# EAGLE board Temp controlled fan v0.1 (EAGLE 8.4.1)
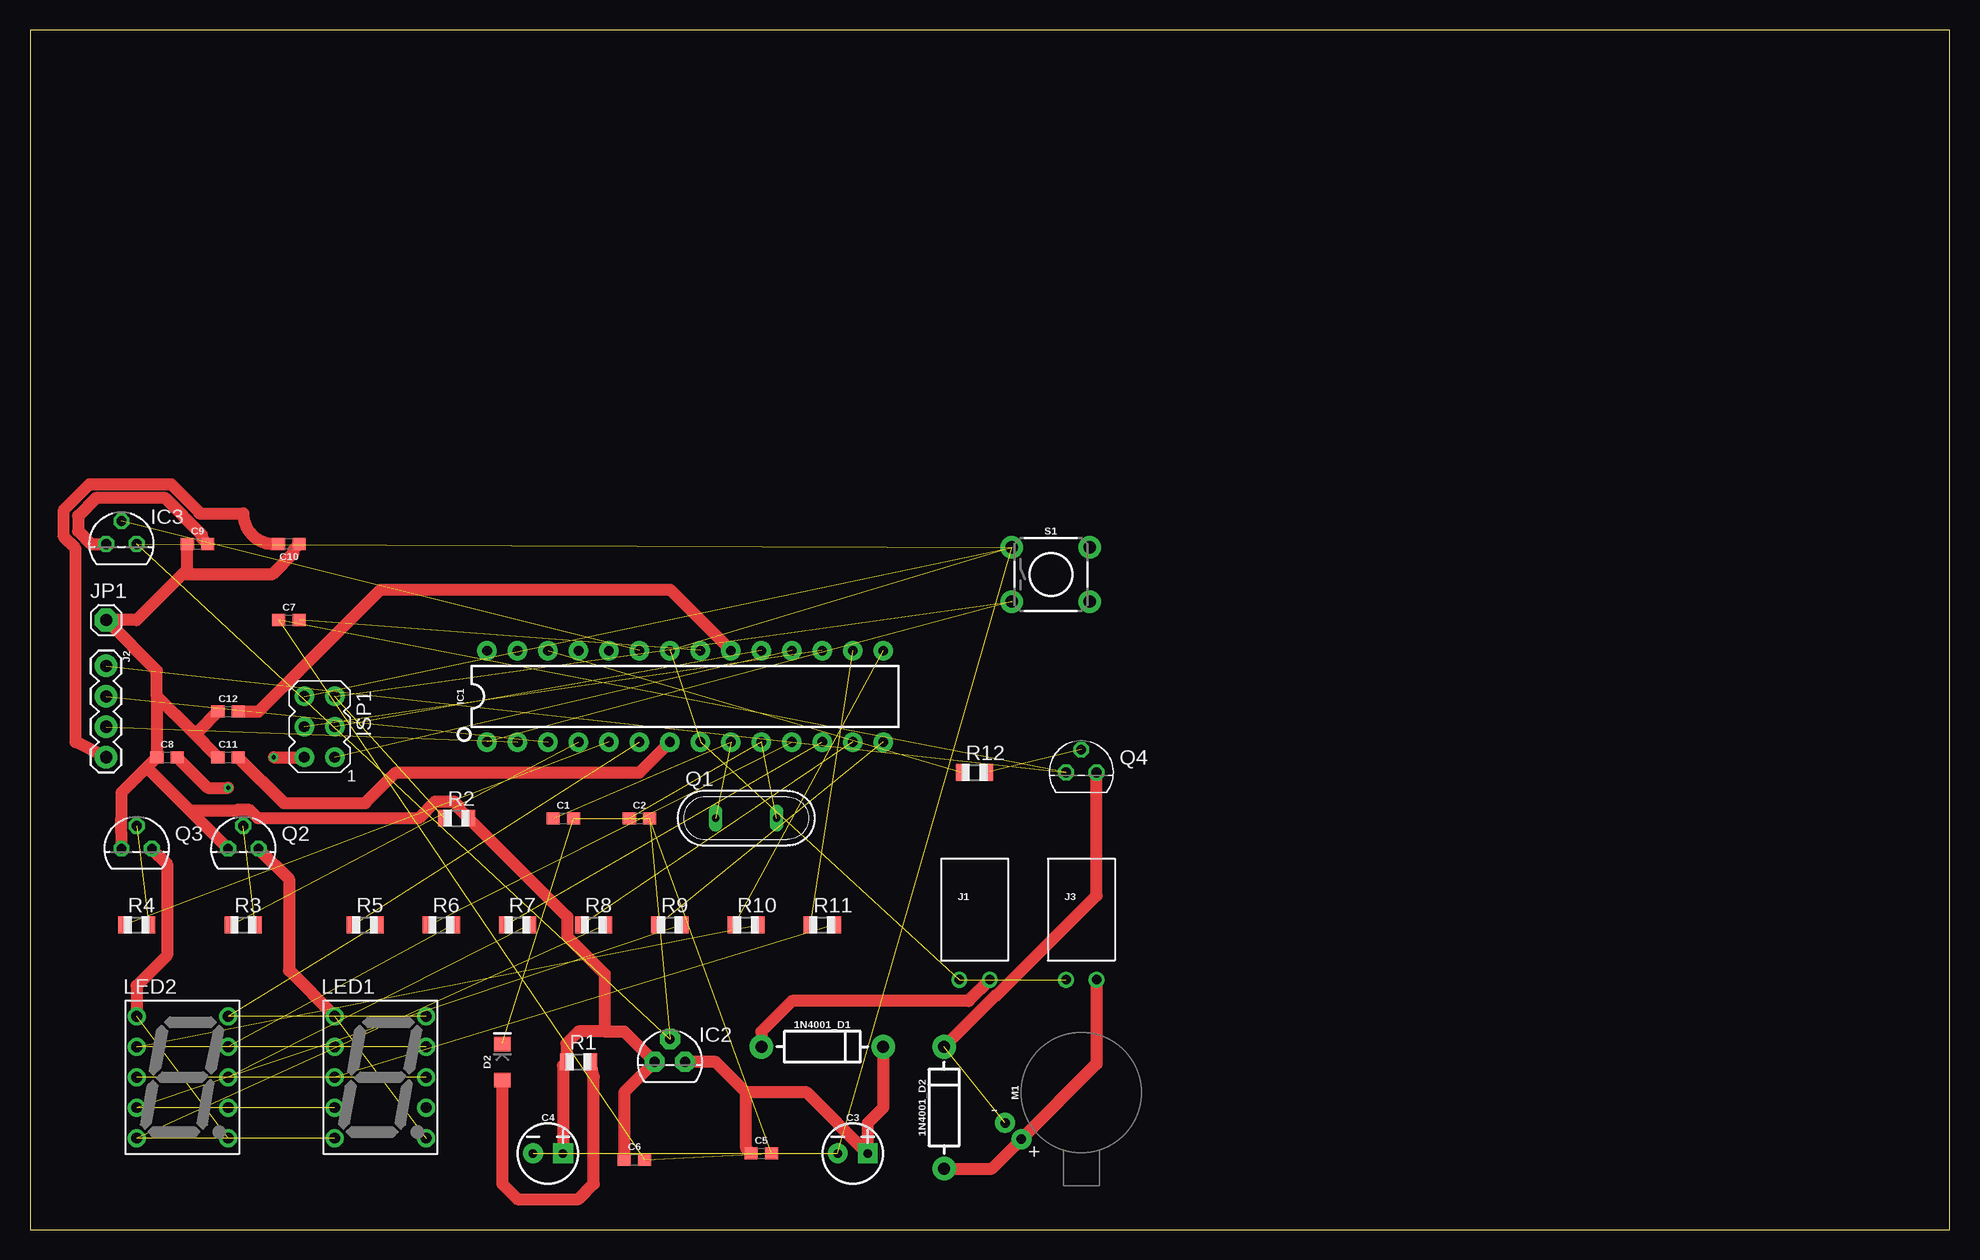
[diagram p0: board, top side]
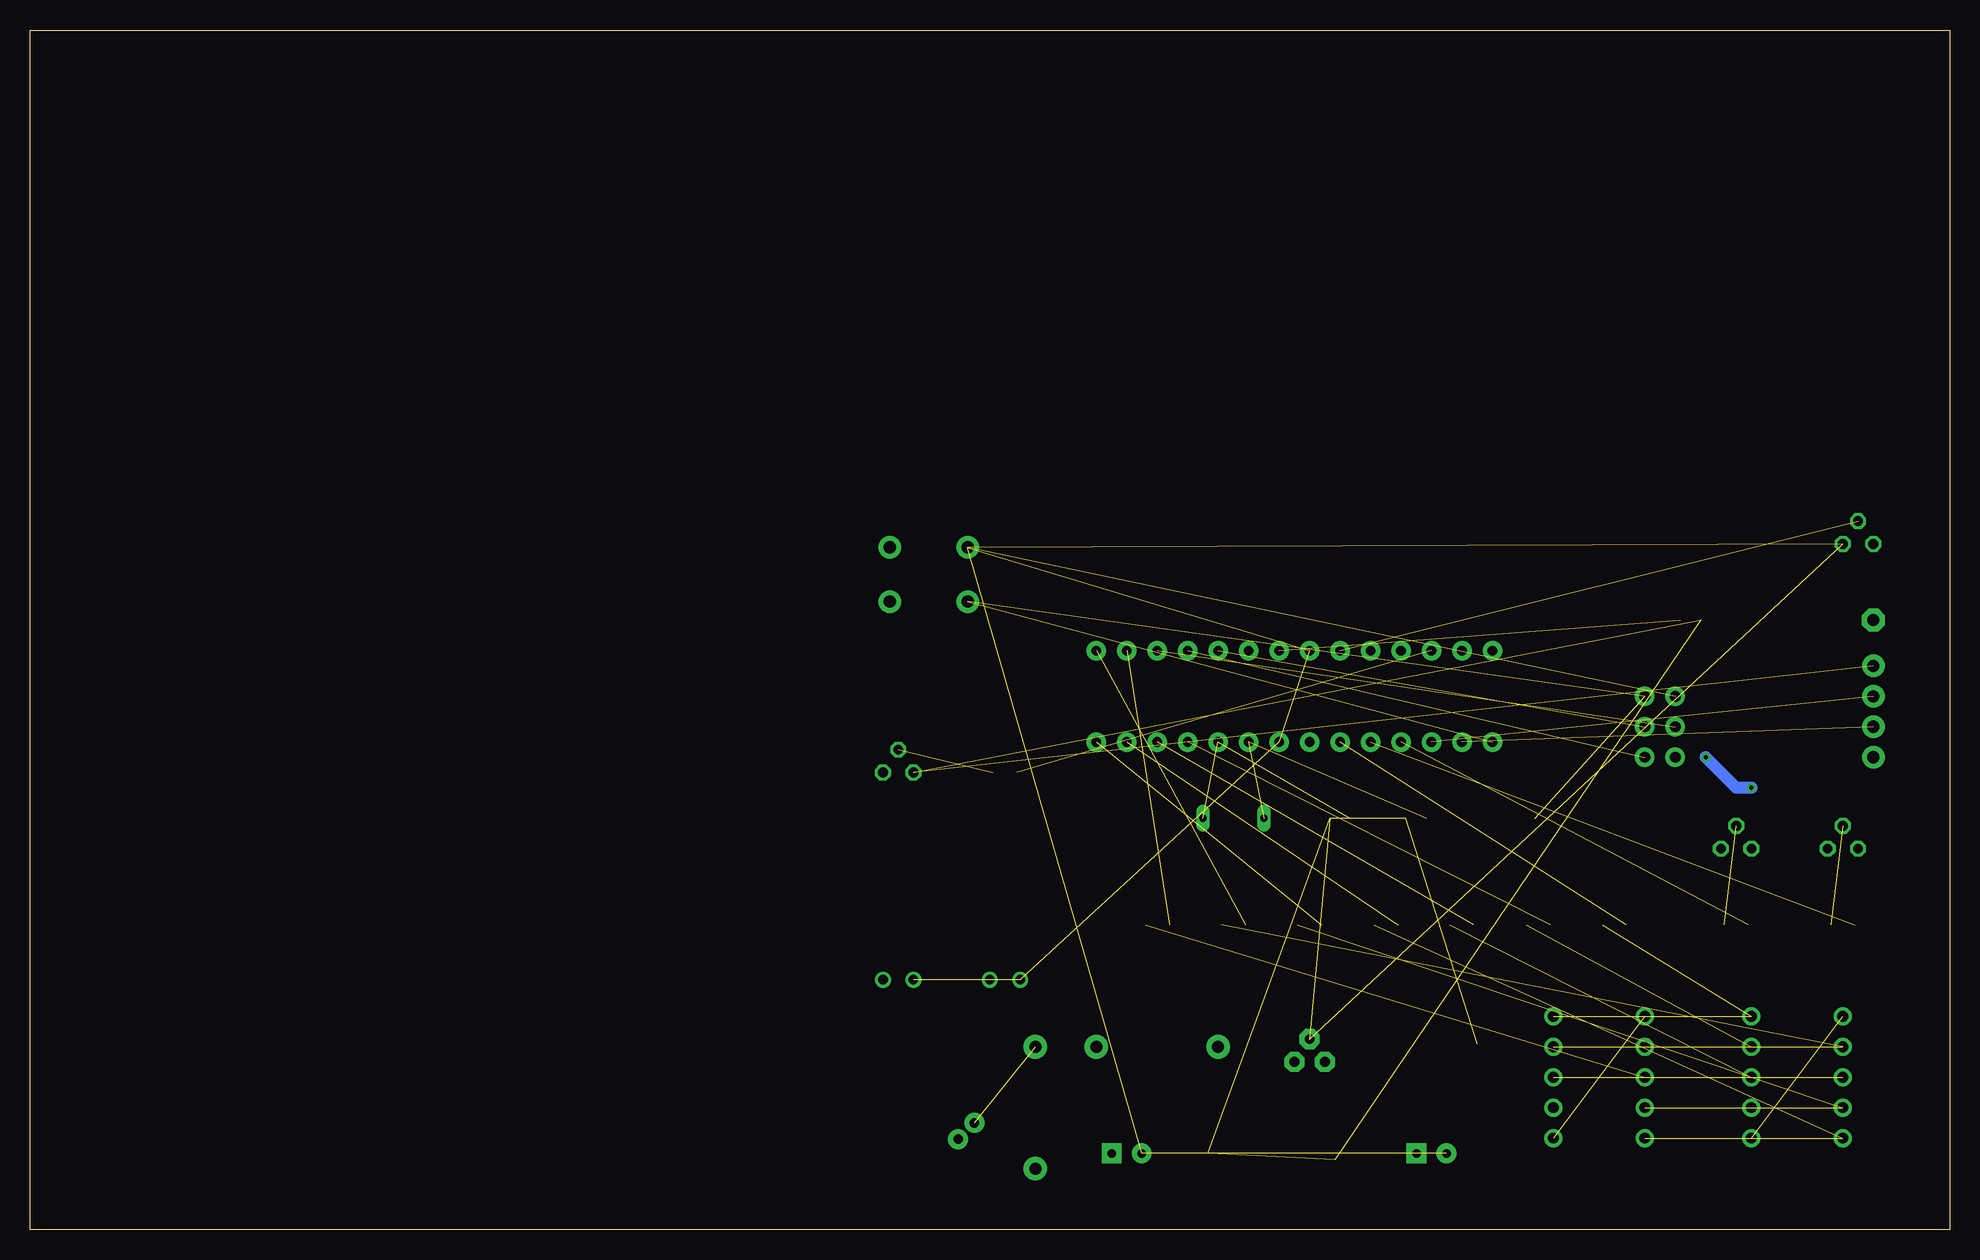
[diagram p1: board, bottom side, seen from below]

Size 160 x 100 mm. Coordinates in mm from the lower left corner, seen from the top.
Outline: 0,0 160,0 160,100 0,100 0,0
Copper layers (1*16): Top 0.035mm / dielectric 1.5mm / Bottom 0.035mm
Design rules "default": minimum track width 6mil, minimum drill 0.35mm, track to track 6mil, track to pad 6mil, pad to pad 6mil, via to via 6mil, smd to smd 6mil, copper to edge 40mil, drill to drill 6mil, minimum pad ring 10mil, minimum via ring 8mil, stop-mask expansion 4mil, vias tented up to drill 0mil, thermal gap 10mil

## Footprints (pad centres in the part's own frame; a part is rotated, then mirrored left to right if it is on the bottom)
DIODE-1N4001 = drill 1 pad 1.981: A -5.08,0; C 5.08,0
0603 = smd 1.1 x 1: 1 -0.85,0; 2 0.85,0
CPOL-RADIAL-2.5MM-5MM = drill 0.7 pad 1.651 square: 1 1.25,0 | drill 0.7 pad 1.651: 2 -1.25,0
LED-1206 = smd 1.2 x 1.4: A -1.5,0; C 1.5,0
DIP28 = drill 0.813 pad 1.626: 1 -16.51,-3.81; 2 -13.97,-3.81; 3 -11.43,-3.81; 4 -8.89,-3.81; 5 -6.35,-3.81; 6 -3.81,-3.81; 7 -1.27,-3.81; 8 1.27,-3.81; 9 3.81,-3.81; 10 6.35,-3.81; 11 8.89,-3.81; 12 11.43,-3.81; 13 13.97,-3.81; 14 16.51,-3.81; 15 16.51,3.81; 16 13.97,3.81; 17 11.43,3.81; 18 8.89,3.81; 19 6.35,3.81; 20 3.81,3.81; 21 1.27,3.81; 22 -1.27,3.81; 23 -3.81,3.81; 24 -6.35,3.81; 25 -8.89,3.81; 26 -11.43,3.81; 27 -13.97,3.81; 28 -16.51,3.81
TO92 = drill 0.813 pad 1.676 octagon: 1 -1.27,0; 2 0,1.905; 3 1.27,0
TO92' = drill 0.813 octagon: 1 -1.27,0; 2 0,1.905; 3 1.27,0
AVRISP = drill 0.9 pad 1.626: 1 -1.27,2.54; 2 1.27,2.54; 3 -1.27,0; 4 1.27,0; 5 -1.27,-2.54; 6 1.27,-2.54
1X02_RA_PTH_FEMALE = drill 0.8: 1 1.27,-5.85; 2 -1.27,-5.85
1X04 = drill 1.016 pad 1.88: 1 0,0; 2 2.54,0; 3 5.08,0; 4 7.62,0
1X01 = drill 1.016 pad 1.93 octagon: 1 0,0
LA-401 = drill 0.9 pad 1.5: 1 -3.81,5.08; 2 -3.81,2.54; 3 -3.81,0; 4 -3.81,-2.54; 5 -3.81,-5.08; 6 3.81,-5.08; 7 3.81,-2.54; 8 3.81,0; 9 3.81,2.54; 10 3.81,5.08
VIBE-MOTOR-10MM = drill 0.8 pad 1.676: + -5,-3.9; - -6.35,-2.54
QS = drill 0.61 long: 1 -2.54,0; 2 2.54,0
TO92'' = drill 0.813 octagon: 1 1.27,0; 2 0,1.905; 3 -1.27,0
R0805 = smd 1.1 x 1.4: 1 -1,0; 2 1,0
TACTILE_SWITCH_PTH_6.0MM = drill 1.016 pad 1.88: 1 -3.251,2.261; 2 3.251,2.261; 3 -3.251,-2.261; 4 3.251,-2.261

## Placement (x,y rotation side)
1N4001_D1  1A/50V/1.1V  [DIODE-1N4001]  66.04,15.24 0 top
1N4001_D2  1A/50V/1.1V  [DIODE-1N4001]  76.2,10.16 90 top
C1  22pF  [0603]  44.45,34.29 0 top
C2  22pF  [0603]  50.8,34.29 0 top
C3  10uF  [CPOL-RADIAL-2.5MM-5MM]  68.58,6.35 0 top
C4  10uF  [CPOL-RADIAL-2.5MM-5MM]  43.18,6.35 0 top
C5  0.1uF  [0603]  60.96,6.35 0 top
C6  0.1uF  [0603]  50.38,5.83 0 top
C7  100nF  [0603]  21.59,50.8 0 top
C8  100nF  [0603]  11.43,39.37 0 top
C9  100nF  [0603]  13.97,57.15 0 top
C10  100nF  [0603]  21.59,57.15 180 top
C11  100nF  [0603]  16.51,39.37 0 top
C12  100nF  [0603]  16.51,43.18 0 top
D2  2.5V  [LED-1206]  39.37,13.97 90 top
IC1  ATMEGA328P  [DIP28]  54.61,44.45 0 top
IC2  7805L  [TO92]  53.34,13.97 0 top
IC3  LM35  [TO92']  7.62,57.15 0 top
ISP1  AVRISP-6  [AVRISP]  24.13,41.91 180 top
J1  9V/12V  [1X02_RA_PTH_FEMALE]  78.74,26.67 0 top
J2  [1X04]  6.35,46.99 270 top
J3  9V/12V  [1X02_RA_PTH_FEMALE]  87.63,26.67 0 top
JP1  [1X01]  6.35,50.8 0 top
LED1  LA-401MD  [LA-401]  29.21,12.7 0 top
LED2  LA-401MD  [LA-401]  12.7,12.7 0 top
M1  MOTOR10MM  [VIBE-MOTOR-10MM]  87.63,11.43 0 top
Q1  16MHz  [QS]  59.69,34.29 0 top
Q2  2N3906  [TO92'']  17.78,31.75 0 top
Q3  2N3906  [TO92'']  8.89,31.75 0 top
Q4  2N3904  [TO92'']  87.63,38.1 0 top
R1  470  [R0805]  45.72,13.97 0 top
R2  10K  [R0805]  35.56,34.29 0 top
R3  1K  [R0805]  17.78,25.4 0 top
R4  1K  [R0805]  8.89,25.4 0 top
R5  330  [R0805]  27.94,25.4 0 top
R6  330  [R0805]  34.29,25.4 0 top
R7  330  [R0805]  40.64,25.4 0 top
R8  330  [R0805]  46.99,25.4 0 top
R9  330  [R0805]  53.34,25.4 0 top
R10  330  [R0805]  59.69,25.4 0 top
R11  330  [R0805]  66.04,25.4 0 top
R12  1K  [R0805]  78.74,38.1 0 top
S1  MOMENTARY-SWITCH-SPST-PTH-6.0MM  [TACTILE_SWITCH_PTH_6.0MM]  85.09,54.61 0 top

## Library data of the parts
1N4001_D1 1N4001_D2 = SparkFun-DiscreteSemi; PROD_ID: DIO-09176
C1 C2 C7-C12 = SparkFun-Capacitors; PROD_ID: CAP-07876
C3 C4 = SparkFun-Capacitors; PROD_ID: CAP-08440
C5 C6 = SparkFun-Capacitors; PROD_ID: CAP-08604
D2 = SparkFun-LED
IC1 = SparkFun-IC-Microcontroller; PROD_ID: IC-09136
IC2 ISP1 JP1 R1-R12 = adafruit
IC3 = lm35
J1 J3 = SparkFun-Connectors; PROD_ID: CONN-13700
J2 = SparkFun-Connectors; PROD_ID: CONN-09696
LED1 LED2 = led-7-segment; OC_FARNELL: unknown; OC_NEWARK: unknown
M1 = SparkFun-Electromechanical; PROD_ID: COMP-08572; SF_SKU: ROB-08449
Q1 = special
Q2 Q3 = transistor-pnp
Q4 = transistor-npn
S1 = SparkFun-Switches; PROD_ID: SWCH-08441; SF_SKU: COM-00097

## Nets
CTRL1: IC1.4 R3.1
CTRL2: IC1.5 R4.1
GND: C1.2 C2.2 C3.2 C4.2 C5.2 C6.2 C7.1 D2.C IC1.8 IC1.22 IC2.2 IC3.3 ISP1.6 J1.2 J2.1 J3.2 Q4.3 S1.1
MISO: IC1.18 ISP1.1
MOSI: IC1.17 ISP1.4
N$1: C2.1 IC1.10 Q1.2
N$2: C7.2 IC1.21
N$3: C1.1 IC1.9 Q1.1
N$4: IC1.23 IC3.2
N$5: D2.A R1.2
N$6: C12.2 IC1.20
N$7: 1N4001_D1.C C3.1 C5.1 IC2.3
N$8: C11.2 IC1.7
N$9: LED2.1 LED2.6 Q3.1
N$10: C10.2 J2.4
N$11: LED1.1 LED1.6 Q2.1
N$12: Q3.2 R4.2
N$13: Q2.2 R3.2
N$14: Q4.2 R12.2
N$15: 1N4001_D2.C M1.- Q4.1
N$16: IC1.26 R12.1
N$17: C9.2 IC3.1
N$18: IC1.16 R11.1
N$19: IC1.15 R10.1
N$20: IC1.14 R9.1
N$21: IC1.13 R8.1
N$22: IC1.12 R7.1
N$23: IC1.11 R6.1
N$24: IC1.6 R5.1
N$25: C8.2 ISP1.2
RST: IC1.1 ISP1.5 R2.1 S1.3
RX: IC1.2 J2.3
SCK: IC1.19 ISP1.3
SEG_A: LED1.10 LED2.10 R5.2
SEG_B: LED1.9 LED2.9 R6.2
SEG_C: LED1.8 LED2.8 R7.2
SEG_D: LED1.5 LED2.5 R8.2
SEG_E: LED1.4 LED2.4 R9.2
SEG_F: LED1.2 LED2.2 R10.2
SEG_G: LED1.3 LED2.3 R11.2
TX: IC1.3 J2.2
V_IN: 1N4001_D1.A J1.1
V_MOTOR: 1N4001_D2.A J3.1 M1.+
VCC: C4.1 C6.1 C8.1 C9.1 C10.1 C11.1 C12.1 IC2.1 JP1.1 Q2.3 Q3.3 R1.1 R2.2

## Tracks (layer width: path | path; a pad name or v marks a point on that pad's centre or on a via)
CTRL1  (1 unrouted)
CTRL2  (1 unrouted)
GND  (17 unrouted)
MISO  (1 unrouted)
MOSI  (1 unrouted)
N$1  (2 unrouted)
N$2  (1 unrouted)
N$3  (2 unrouted)
N$4  (1 unrouted)
N$5
  Top 1.016: D2.A 39.37,3.81 40.64,2.54 45.72,2.54 46.99,3.81 46.99,12.7 R1.2
N$6
  Top 1.016: C12.2 19.05,43.18 29.21,53.34 53.34,53.34 IC1.20
N$7
  Top 1.016: 1N4001_D1.C 71.12,10.16 69.83,8.87 C3.1 64.75,11.43 59.69,11.43 | 59.69,11.43 57.15,13.97 IC2.3 | C5.1 59.69,6.77 59.69,11.43
N$8
  Top 1.016: C11.2 21.17,35.56 27.94,35.56 30.48,38.1 50.8,38.1 IC1.7
N$9  (1 unrouted)
  Top 1.016: Q3.1 11.43,30.48 11.43,22.86 8.89,20.32 LED2.1
N$10
  Top 1.016: J2.4 3.81,40.64 3.81,56.77 2.83,57.74 2.83,59.98 4.98,62.13 11.78,62.13 14.09,59.81 arc90 14.22,59.69 17.78,59.69 arc90 20.32,57.15 C10.2
N$11  (1 unrouted)
  Top 1.016: Q2.1 21.59,29.21 21.59,21.59 LED1.1
N$12  (1 unrouted)
N$13  (1 unrouted)
N$14  (1 unrouted)
N$15  (1 unrouted)
  Top 1.016: 1N4001_D2.C 80.47,19.51 80.55,19.51 88.9,27.85 Q4.1
N$16  (1 unrouted)
N$17
  Top 1.016: C9.2 14.33,57.64 14.33,57.92 11.29,60.96 5.46,60.96 4,59.5 4,58.23 5.08,57.15 IC3.1
N$18  (1 unrouted)
N$19  (1 unrouted)
N$20  (1 unrouted)
N$21  (1 unrouted)
N$22  (1 unrouted)
N$23  (1 unrouted)
N$24  (1 unrouted)
N$25  (via drill 0.35)
  Top 1.016: C8.2 14.82,36.83 v16.51,36.83 | v20.32,39.37 ISP1.2
  Bottom 1.016: v16.51,36.83 17.78,36.83 v20.32,39.37
RST  (3 unrouted)
RX  (1 unrouted)
SCK  (1 unrouted)
SEG_A  (2 unrouted)
SEG_B  (2 unrouted)
SEG_C  (2 unrouted)
SEG_D  (2 unrouted)
SEG_E  (2 unrouted)
SEG_F  (2 unrouted)
SEG_G  (2 unrouted)
TX  (1 unrouted)
V_IN
  Top 1.016: J1.1 78.24,19.05 63.5,19.05 60.96,16.51 1N4001_D1.A
V_MOTOR
  Top 1.016: J3.1 88.9,13.8 M1.+ 80.18,5.08 1N4001_D2.A
VCC
  Top 1.016: 9.73,38.52 C8.1 10.58,44.45 | 9.73,38.52 7.62,36.41 7.62,34.25 7.57,34.2 7.57,33.11 7.62,33.06 Q3.3 | C9.1 13.12,55.03 12.7,54.61 | 12.7,54.61 8.89,50.8 JP1.1 10.58,46.57 10.58,44.45 | C10.1 21.95,56.66 21.95,56.38 20.18,54.61 12.7,54.61 | 13.54,41.48 C11.1 | 13.54,41.48 10.58,44.45 | 13.36,34.91 Q2.3 | 13.36,34.91 9.73,38.52 | C12.1 13.96,41.48 13.54,41.48 | 47.9,16.51 49.53,16.51 IC2.1 49.53,11.43 49.53,7.62 C6.1 | 47.9,16.51 45.72,16.51 44.72,15.51 R1.1 44.43,13.68 C4.1 | 13.36,34.91 17.16,34.91 17.23,34.98 18.33,34.98 19.01,34.29 32.38,34.29 33.74,35.65 35.38,35.65 35.77,35.26 35.77,35.08 R2.2 44.78,26.07 44.78,24.43 47.9,21.3 47.9,16.51